# EAGLE board DBSchematics (EAGLE 8.2.1)
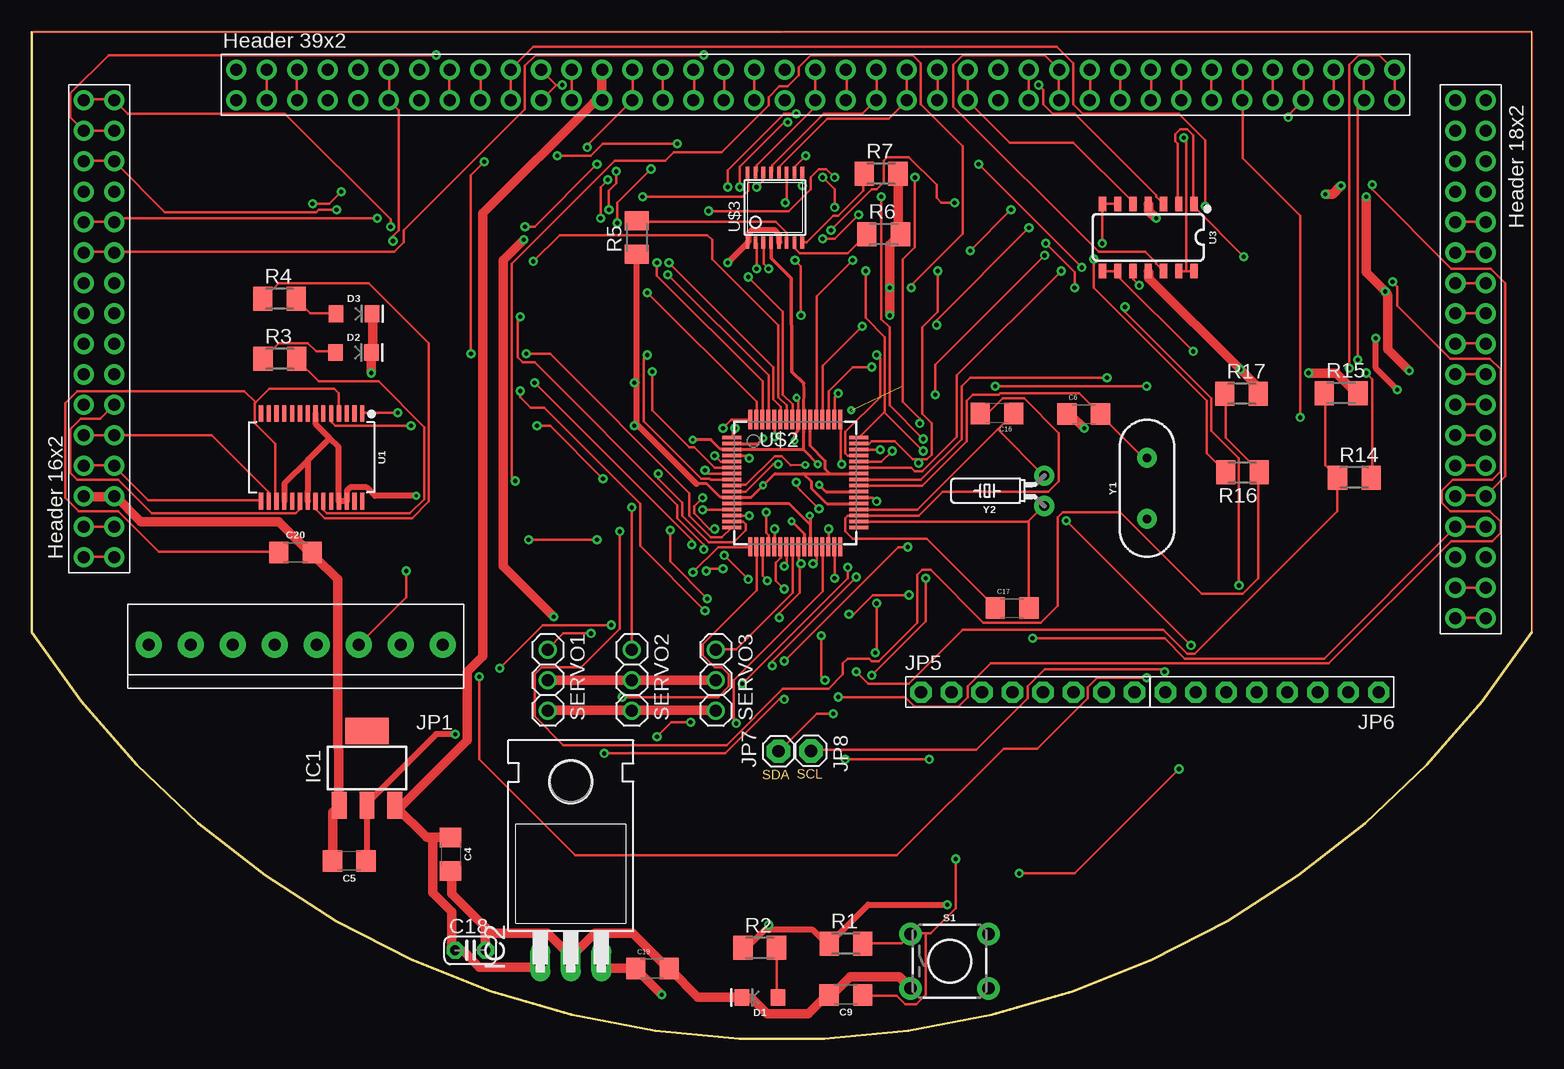
[diagram p0: board, top side]
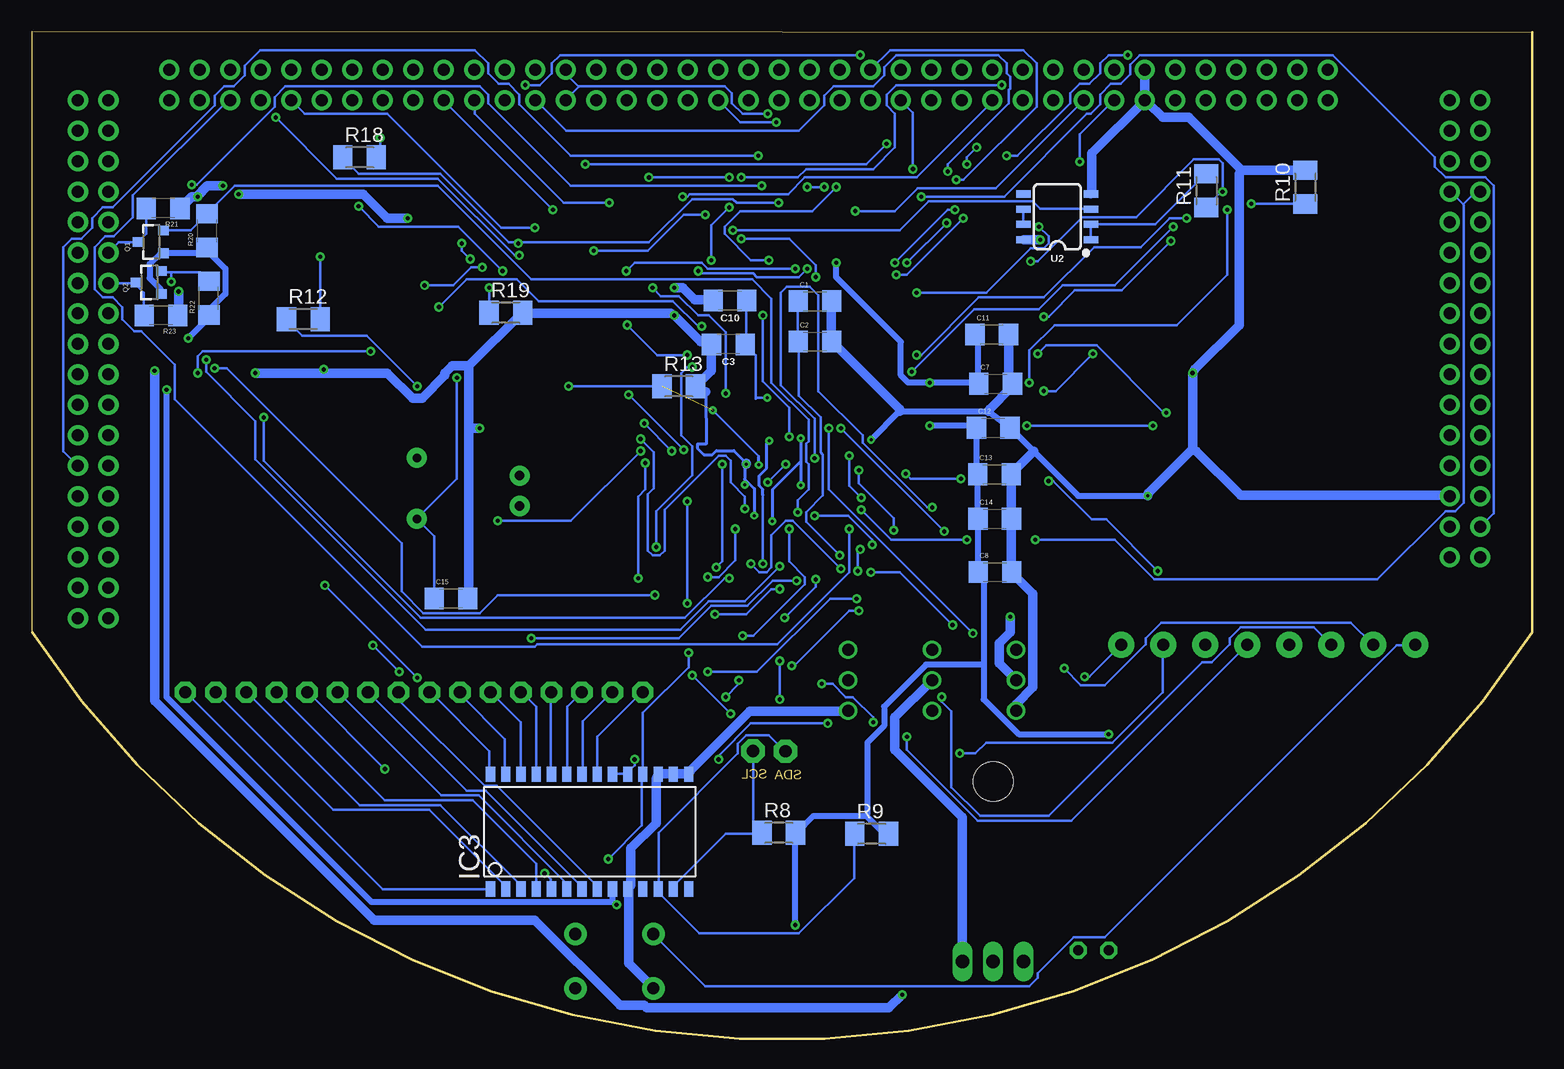
[diagram p1: board, bottom side, seen from below]

Size 125.02 x 83.99 mm. Coordinates in mm from the lower left corner, seen from the top.
Outline: 0,83.9 125.02,83.99 125.02,33.89 arc-114 0.02,33.89 0.02,83.89
Copper layers (1*16): Top 0.035mm / dielectric 1.5mm / Bottom 0.035mm
Design rules "default": minimum track width 6mil, minimum drill 0.35mm, track to track 6mil, track to pad 6mil, pad to pad 6mil, via to via 6mil, smd to smd 6mil, copper to edge 40mil, drill to drill 6mil, minimum pad ring 10mil, minimum via ring 8mil, stop-mask expansion 4mil, vias tented up to drill 0mil, thermal gap 10mil
Net classes: 0 default: width 0.2 mm, clearance 0.2 mm; 1 VSERVO: width 0.8 mm, clearance 0.2 mm; 2 VDD: width 0.5 mm, clearance 0.2 mm

## Footprints (pad centres in the part's own frame; a part is rotated, then mirrored left to right if it is on the bottom)
1206 = smd 1.6 x 1.8: 1 -1.4,0; 2 1.4,0
C025-024X044 = drill 0.813 pad 1.422 octagon: 1 -1.27,0; 2 1.27,0
LED-1206 = smd 1.2 x 1.4: A -1.5,0; C 1.5,0
SOT223 = smd 1.219 x 2.235: 1 -2.311,-3.099; 2 0,-3.099; 3 2.311,-3.099 | smd 3.6 x 2.2: TAB 0,3.099
TO220H = drill 1.118 long: 1 -2.54,-10.16; 2 0,-10.16; 3 2.54,-10.16 | hole 3.302: 0,4.826
SO28W = smd 0.762 x 1.27: 1 -7.62,-4.78; 2 -6.35,-4.78; 3 -5.08,-4.78; 4 -3.81,-4.78; 5 -2.54,-4.78; 6 -1.27,-4.78; 7 0,-4.78; 8 1.27,-4.78; 9 2.54,-4.78; 10 3.81,-4.78; 11 5.08,-4.78; 12 6.35,-4.78; 13 7.62,-4.78; 14 8.89,-4.78; 15 8.89,4.78; 16 7.62,4.78; 17 6.35,4.78; 18 5.08,4.78; 19 3.81,4.78; 20 2.54,4.78; 21 1.27,4.78; 22 0,4.78; 23 -1.27,4.78; 24 -2.54,4.78; 25 -3.81,4.78; 26 -5.08,4.78; 27 -6.35,4.78; 28 -7.62,4.78
1X08-3.5MM = drill 1 pad 2.184: 1 -12.25,0; 2 -8.75,0; 3 -5.25,0; 4 -1.75,0; 5 1.75,0; 6 5.25,0; 7 8.75,0; 8 12.25,0
1X08-BIG = drill 1.016 pad 1.778 octagon: 1 -8.89,0; 2 -6.35,0; 3 -3.81,0; 4 -1.27,0; 5 1.27,0; 6 3.81,0; 7 6.35,0; 8 8.89,0
1X01 = drill 1.016 pad 1.93 octagon: 1 0,0
SOT23-3 = smd 0.8 x 0.9: 1 -0.95,-1; 2 0.95,-1; 3 0,1.1
M1206 = smd 1.6 x 2: 1 -1.4,0; 2 1.4,0
TACTILE_SWITCH_PTH_6.0MM = drill 1.016 pad 1.88: 1 -3.251,2.261; 2 3.251,2.261; 3 -3.251,-2.261; 4 3.251,-2.261
1X03 = drill 1.016: 1 -2.54,0; 2 0,0; 3 2.54,0
SSOP28DB = smd 0.348 x 1.397: 1 -4.225,-3.656; 2 -3.575,-3.656; 3 -2.925,-3.656; 4 -2.275,-3.656; 5 -1.625,-3.656; 6 -0.975,-3.656; 7 -0.325,-3.656; 8 0.325,-3.656; 9 0.975,-3.656; 10 1.625,-3.656; 11 2.275,-3.656; 12 2.925,-3.656; 13 3.575,-3.656; 14 4.225,-3.656; 15 4.225,3.656; 16 3.575,3.656; 17 2.925,3.656; 18 2.275,3.656; 19 1.625,3.656; 20 0.975,3.656; 21 0.325,3.656; 22 -0.325,3.656; 23 -0.975,3.656; 24 -1.625,3.656; 25 -2.275,3.656; 26 -2.925,3.656; 27 -3.575,3.656; 28 -4.225,3.656
SO08 = smd 0.6 x 1.2: 1 -1.905,-2.8; 2 -0.635,-2.8; 3 0.635,-2.8; 4 1.905,-2.8; 5 1.905,2.8; 6 0.635,2.8; 7 -0.635,2.8; 8 -1.905,2.8
SO14 = smd 0.6 x 1.2: 1 -3.175,-2.8; 2 -1.905,-2.8; 3 -0.635,-2.8; 4 0.635,-2.8; 5 1.905,-2.8; 6 3.175,-2.8; 7 4.445,-2.8; 8 4.445,2.8; 9 3.175,2.8; 10 1.905,2.8; 11 0.635,2.8; 12 -0.635,2.8; 13 -1.905,2.8; 14 -3.175,2.8
DAUGHTERBOARD = drill 1 pad 1.676: 1 -22.86,-22.86; 1' -25.4,-22.86; 2 -22.86,-20.32; 2' -25.4,-20.32; 3 -22.86,-17.78; 3' -25.4,-17.78; 4 -22.86,-15.24; 4' -25.4,-15.24; 5 -22.86,-12.7; 5' -25.4,-12.7; 6 -22.86,-10.16; 6' -25.4,-10.16; 7 -22.86,-7.62; 7A -25.4,-7.62; 8 -22.86,-5.08; 8A -25.4,-5.08; 9 -22.86,-2.54; 9A -25.4,-2.54; 10 -22.86,0; 10A -25.4,0; 11 -22.86,2.54; 11' -25.4,2.54; 12 -22.86,5.08; 12' -25.4,5.08; 13 -22.86,7.62; 13' -25.4,7.62; 14 -22.86,10.16; 14' -25.4,10.16; 15 -22.86,12.7; 15' -25.4,12.7; 16 -22.86,15.24; 16' -25.4,15.24; 17A -12.7,17.78; 17B -12.7,15.24; 18 -10.16,15.24; 18' -10.16,17.78; 19 -7.62,15.24; 19' -7.62,17.78; 20 -5.08,15.24; 20A -5.08,17.78; 21 -2.54,15.24; 21A -2.54,17.78; 22 0,15.24; 22' 0,17.78; 23 2.54,15.24; 23' 2.54,17.78; 24 5.08,15.24; 24' 5.08,17.78; 25 7.62,15.24; 25' 7.62,17.78; 26 10.16,15.24; 26' 10.16,17.78; 27 12.7,15.24; 27' 12.7,17.78; 28 15.24,15.24; 28' 15.24,17.78; 29 17.78,15.24; 29' 17.78,17.78; 30 20.32,15.24; 30' 20.32,17.78; 31 22.86,15.24; 31' 22.86,17.78; 32 25.4,15.24; 32' 25.4,17.78; 33 27.94,15.24; 33' 27.94,17.78; 34 30.48,15.24; 34' 30.48,17.78; 35 33.02,15.24; 35A 33.02,17.78; 36 35.56,15.24; 36' 35.56,17.78; 37 38.1,15.24; 37' 38.1,17.78; 38 40.64,15.24; 38' 40.64,17.78; 39 43.18,15.24; 39' 43.18,17.78; 40 45.72,15.24; 40' 45.72,17.78; 41 48.26,15.24; 41' 48.26,17.78; 42 50.8,15.24; 42' 50.8,17.78; 43 53.34,15.24; 43' 53.34,17.78; 44 55.88,15.24; 44' 55.88,17.78; 45 58.42,15.24; 45' 58.42,17.78; 46 60.96,15.24; 46' 60.96,17.78; 47 63.5,15.24; 47' 63.5,17.78; 48 66.04,15.24; 48' 66.04,17.78; 49 68.58,15.24; 49' 68.58,17.78; 50 71.12,15.24; 50' 71.12,17.78; 51 73.66,15.24; 51' 73.66,17.78; 52 76.2,15.24; 52' 76.2,17.78; 53 78.74,15.24; 53' 78.74,17.78; 54 81.28,15.24; 54' 81.28,17.78; 55 83.82,15.24; 55' 83.82,17.78; 57 88.9,15.24; 57A 91.44,15.24; 58 88.9,12.7; 58A 91.44,12.7; 59 88.9,10.16; 59A 91.44,10.16; 60 88.9,7.62; 60A 91.44,7.62; 61 88.9,5.08; 61' 91.44,5.08; 62 88.9,2.54; 62' 91.44,2.54; 63 88.9,0; 63' 91.44,0; 64 88.9,-2.54; 64' 91.44,-2.54; 65 88.9,-5.08; 65' 91.44,-5.08; 66 88.9,-7.62; 66' 91.44,-7.62; 67 88.9,-10.16; 67' 91.44,-10.16; 68 88.9,-12.7; 68' 91.44,-12.7; 69 88.9,-15.24; 69' 91.44,-15.24; 70 88.9,-17.78; 70' 91.44,-17.78; 71 88.9,-20.32; 71' 91.44,-20.32; 72 88.9,-22.86; 72' 91.44,-22.86; 73 88.9,-25.4; 73' 91.44,-25.4; 74 88.9,-27.94; 74' 91.44,-27.94
LQFP = smd 1.6 x 0.3: 1 -5.3,3.8; 2 -5.3,3.3; 3 -5.3,2.8; 4 -5.3,2.3; 5 -5.3,1.8; 6 -5.3,1.3; 7 -5.3,0.8; 8 -5.3,0.3; 9 -5.3,-0.2; 10 -5.3,-0.7; 11 -5.3,-1.2; 12 -5.3,-1.7; 13 -5.3,-2.2; 14 -5.3,-2.7; 15 -5.3,-3.2; 16 -5.3,-3.7; 33 5.3,-3.7; 34 5.3,-3.2; 35 5.3,-2.7; 36 5.3,-2.2; 37 5.3,-1.7; 38 5.3,-1.2; 39 5.3,-0.7; 40 5.3,-0.2; 41 5.3,0.3; 42 5.3,0.8; 43 5.3,1.3; 44 5.3,1.8; 45 5.3,2.3; 46 5.3,2.8; 47 5.3,3.3; 48 5.3,3.8 | smd 0.3 x 1.6: 17 -3.75,-5.3; 18 -3.25,-5.3; 19 -2.75,-5.3; 20 -2.25,-5.3; 21 -1.75,-5.3; 22 -1.25,-5.3; 23 -0.75,-5.3; 24 -0.25,-5.3; 25 0.25,-5.3; 26 0.75,-5.3; 27 1.25,-5.3; 28 1.75,-5.3; 29 2.25,-5.3; 30 2.75,-5.3; 31 3.25,-5.3; 32 3.75,-5.3; 49 3.75,5.3; 50 3.25,5.3; 51 2.75,5.3; 52 2.25,5.3; 53 1.75,5.3; 54 1.25,5.3; 55 0.75,5.3; 56 0.25,5.3; 57 -0.25,5.3; 58 -0.75,5.3; 59 -1.25,5.3; 60 -1.75,5.3; 61 -2.25,5.3; 62 -2.75,5.3; 63 -3.25,5.3; 64 -3.75,5.3
ADC12_SD = smd 0.305 x 0.991: 1 -2.275,-2.918; 2 -1.625,-2.918; 3 -0.975,-2.918; 4 -0.325,-2.918; 5 0.325,-2.918; 6 0.975,-2.918; 7 1.625,-2.918; 8 2.275,-2.918; 9 2.275,2.918; 10 1.625,2.918; 11 0.975,2.918; 12 0.325,2.918; 13 -0.325,2.918; 14 -0.975,2.918; 15 -1.625,2.918; 16 -2.275,2.918
HC49US = drill 0.7 pad 1.651: 1 -2.54,0; 2 2.54,0
CRYSTAL-PTH-2X6-CYL = drill 0.813 pad 1.676: 1 -1.27,0; 2 1.27,0

## Placement (x,y rotation side)
C1  0.01uF  [1206]  59.79,61.48 0 bottom
C2  0.01uF  [1206]  59.78,58.12 0 bottom
C3  2.2uF  [1206]  67,57.88 180 bottom
C4  10uF  [1206]  34.93,15.39 270 top
C5  10uF  [1206]  26.48,14.82 180 top
C6  24pF  [1206]  87.69,52.08 0 top
C7  2.2uF  [1206]  44.73,54.6 0 bottom
C8  0.01uF  [1206]  44.79,38.91 0 bottom
C9  2.2uF  [1206]  67.86,3.67 180 top
C10  1.0uF  [1206]  66.87,61.52 180 bottom
C11  0.01uF  [1206]  45.05,58.71 0 bottom
C12  0.01uF  [1206]  44.92,50.93 0 bottom
C13  0.01uF  [1206]  44.82,47.05 0 bottom
C14  0.01uF  [1206]  44.8,43.35 0 bottom
C15  24pF  [1206]  90.11,36.71 0 bottom
C16  10pf  [1206]  80.45,52.13 180 top
C17  10pF  [1206]  81.72,35.91 0 top
C18  100uF  [C025-024X044]  36.57,7.38 0 top
C19  0.1uF  [1206]  51.74,5.88 0 top
C20  0.1uF  [1206]  21.99,40.54 0 top
D1  WHITE  [LED-1206]  60.71,3.45 180 top
D2  GREEN  [LED-1206]  26.84,57.19 0 top
D3  RED  [LED-1206]  26.87,60.43 0 top
IC1  LM1117-3.3  [SOT223]  27.95,22.57 0 top
IC2  7805T  [TO220H]  44.94,16.62 0 top
IC3  MCP23017SO  [SO28W]  79.2,17.27 0 bottom
JP1  [1X08-3.5MM]  22.02,32.84 0 top
JP5  [1X08-BIG]  83.02,28.89 0 top
JP6  [1X08-BIG]  103.37,28.89 180 top
JP7  [1X01]  62.24,23.98 90 top
JP8  [1X01]  64.95,24 270 top
Q1  BSS138  [SOT23-3]  115.08,66.43 90 bottom
Q2  BSS138  [SOT23-3]  115.23,63.04 90 bottom
R1  10K  [M1206]  67.87,7.93 0 top
R2  330  [M1206]  60.68,7.58 0 top
R3  330  [M1206]  20.69,56.67 0 top
R4  330  [M1206]  20.67,61.67 0 top
R5  4.7K  [M1206]  50.45,66.79 90 top
R6  1K  [M1206]  71.01,67.06 0 top
R7  1K  [M1206]  70.8,72.09 0 top
R8  10K  [M1206]  62.8,17.17 0 bottom
R9  10k  [M1206]  55.07,17.09 0 bottom
R10  33K  [M1206]  18.92,70.98 90 bottom
R11  22K  [M1206]  27.16,70.69 90 bottom
R12  22K  [M1206]  102.42,59.98 0 bottom
R13  33K  [M1206]  71.14,54.37 0 bottom
R14  22k  [M1206]  110.23,46.78 0 top
R15  33k  [M1206]  109.13,53.82 0 top
R16  22K  [M1206]  100.91,47.21 180 top
R17  33k  [M1206]  100.84,53.75 0 top
R18  22K  [M1206]  97.73,73.46 0 bottom
R19  33K  [M1206]  85.55,60.51 0 bottom
R20  10K  [1206]  110.44,67.36 90 bottom
R21  10K  [1206]  114.1,69.22 180 bottom
R22  10K  [1206]  110.29,61.73 90 bottom
R23  10K  [1206]  114.28,60.28 180 bottom
S1  Push Button  [TACTILE_SWITCH_PTH_6.0MM]  76.5,6.48 0 top
SERVO1  [1X03]  43.02,29.89 270 top
SERVO2  [1X03]  50.02,29.89 270 top
SERVO3  [1X03]  57.02,29.89 270 top
U1  FT232RL  [SSOP28DB]  23.34,48.47 180 top
U2  LMV358  [SO08]  39.59,68.51 90 bottom
U3  LMV324  [SO14]  93.7,66.78 180 top
U$1  DAUGHTERBOARDDAUGHTERBOARD  [DAUGHTERBOARD]  29.76,62.99 0 top
U$2  TM4C123GH6PMS-PQFP-G64  [LQFP]  63.65,46.32 0 top
U$3  ADC128D818  [ADC12_SD]  61.95,69.28 0 top
Y1  16MHz  [HC49US]  92.96,45.88 90 top
Y2  32.768kHz  [CRYSTAL-PTH-2X6-CYL]  84.4,45.68 90 top

## Library data of the parts
C1 C2 C6-C8 C11-C17 C19 = SparkFun-Retired; PROD_ID: CAP-10009
C3 C9 = SparkFun-Capacitors; PROD_ID: CAP-10009
C4 C5 C20 = SparkFun-Capacitors; PROD_ID: CAP-10057
C10 = SparkFun-Capacitors; PROD_ID: CAP-09822
C18 IC2 IC3 JP1 JP5-JP8 R1-R19 SERVO1-SERVO3 = adafruit
D1-D3 = SparkFun-LED; PROD_ID: DIO-09955
IC1 = lm1117
Q1 Q2 R20-R23 = SparkFun
S1 = SparkFun-Switches; PROD_ID: SWCH-08441; SF_SKU: COM-00097
U1 = SparkFun-IC-Comms; PROD_ID: IC-00870
U2 = SparkFun-IC-Amplifiers; PROD_ID: IC-09657
U3 = SparkFun-IC-Amplifiers; PROD_ID: IC-08227
U$1 = Daughterboard
U$2 = TM4C123GH6PM
U$3 = ADC128D818
Y1 = SparkFun-Clocks; PROD_ID: XTAL-08181; SF_ID: COM-00536
Y2 = SparkFun-Clocks; PROD_ID: XTAL-10112

## Nets
BUZZER: U$1.71 U$1.71' U$2.19
DB4: U$1.26 U$1.26' U$2.43
DB5: U$1.25 U$1.25' U$2.44
DB6: U$1.27 U$1.27' U$2.53
DB7: U$1.28 U$1.28' U$2.10
EN: U$1.24 U$1.24' U$2.30
EXTSHARP: R18.1 R19.1 U$3.11
FDSFSDF: R12.2 U3.1 U3.2
GND [VSERVO]: C1.2 C2.2 C3.2 C4.2 C5.2 C6.1 C7.2 C8.2 C9.2 C10.2 C11.2 C12.2 C13.2 C14.2 C15.2 C18.2 C19.2 C20.2 D1.C D2.C D3.C IC1.1 IC2.2 IC3.10 IC3.15 IC3.16 IC3.17 R6.2 R7.2 R10.2 R13.2 R15.2 R17.2 R19.2 S1.3 SERVO1.3 SERVO2.3 SERVO3.3 U1.7 U1.18 U1.21 U1.25 U1.26 U2.4 U3.11 U$1.3 U$1.3' U$1.23 U$1.23' U$2.3 U$2.12 U$2.27 U$2.39 U$2.55 U$3.4
GNDX: C16.2 C17.1 U$2.35
HGHJ: R11.2 U2.1 U2.2
INTAB: IC3.19 IC3.20 U$2.29
IR8: U$1.2 U$1.2' U$3.16
LPE: Q1.3 R21.2 U$1.62 U$1.62'
N$1: U$1.1 U$1.1'
N$2: IC3.21 JP5.1
N$3: C6.2 U$2.40 Y1.2
N$5: IC3.22 JP5.2
N$6: U2.6 U2.7
N$7: U$1.70 U$1.70' U$3.9
N$8: IC3.23 JP5.3
N$9: IC3.24 JP5.4
N$10: IC3.25 JP5.5
N$11: JP1.8 U$2.52
N$12: U$1.74 U$1.74'
N$13: U$1.73 U$1.73'
N$14: R18.2 U3.13 U3.14
N$15: JP1.7 U$2.51
N$16: U$1.69 U$1.69' U$3.10
N$17: U$1.68 U$1.68'
N$18: U$1.67 U$1.67'
N$19: U$1.66 U$1.66'
N$20: U$1.65 U$1.65'
N$21: U$1.64 U$1.64'
N$22: R6.1 U$3.7
N$23: IC3.26 JP5.6
N$24: U$1.61 U$1.61'
N$25: JP1.6 U$2.50
N$26: D1.A R2.2
N$27: C17.2 U$2.34 Y2.1
N$28: C16.1 U$2.36 Y2.2
N$29: U$1.18 U$1.18'
N$30: U$1.19 U$1.19'
N$31: JP1.5 U$2.49
N$32: IC3.27 JP5.7
N$33: IC3.28 JP5.8
N$34: IC3.1 JP6.1
N$35: IC3.2 JP6.2
N$36: IC3.3 JP6.3
N$37: IC3.4 JP6.4
N$38: IC3.5 JP6.5
N$39: IC3.6 JP6.6
N$40: IC3.7 JP6.7
N$41: IC3.8 JP6.8
N$42: U$1.33 U$1.33'
N$43: U$1.34 U$1.34'
N$48: U$1.40 U$1.40'
N$55: U$1.47 U$1.47'
N$56: U$1.48 U$1.48'
N$57: U$1.49 U$1.49'
N$67: R4.1 U1.22
N$68: R3.2 U1.23
N$69: D3.A R4.2
N$70: D2.A R3.1
N$71: R5.2 U$3.6
N$73: R7.1 U$3.8
N$77: C20.1 U1.4 U1.17
NO: C15.1 U$2.41 Y1.1
PA3: Q1.2 R20.2 U$2.20
PA4: Q2.2 R22.2 U$2.21
PA5: U$1.55 U$1.55' U$2.22
PA6: U$1.54 U$1.54' U$2.23
PB0: U$1.51 U$1.51' U$2.45
PB1: U$1.52 U$1.52' U$2.46
PB4: R10.1 R11.1 U$2.58
PB5: U$1.46 U$1.46' U$2.57
PD3: R16.1 R17.1 U$2.64
PE0: R12.1 R13.1 U$2.9
PE1: U$1.12 U$1.12' U$2.8
PE2: R14.1 R15.1 U$2.7
PE3: U$1.16 U$1.16' U$2.6
PE4: U$1.43 U$1.43' U$2.59
PE5: U$1.42 U$1.42' U$2.60
PF3: U$1.50 U$1.50' U$2.31
PF4: U$1.53 U$1.53' U$2.5
RPE: Q2.3 R23.2 U$1.63 U$1.63'
RS: U$1.22 U$1.22' U$2.28
RST: C9.1 IC3.18 JP1.1 R1.2 S1.1 U$2.38
RX: JP1.2 U$2.17
RXD: U1.1 U$2.16
SCL: IC3.12 JP7.1 R9.1 U$2.47 U$3.3
SDA: IC3.13 JP8.1 R8.1 U$2.48 U$3.2
SDFSDFSD: R14.2 U3.8 U3.9
SERVO1: SERVO1.1 U$2.1
SERVO2: SERVO2.1 U$2.4
SERVO3: SERVO3.1 U$2.24
SHARP1: U3.3 U$1.11 U$1.11'
SHARP2: U3.10 U$1.15 U$1.15'
SHARP3: U3.5 U$1.41 U$1.41'
SHARP4: U3.12 U$1.44 U$1.44'
SHARP5: U2.3 U$1.45 U$1.45'
TX: JP1.3 U$2.18
TXD: U1.5 U$2.15
USB+: U1.15 U$1.4 U$1.4'
USB-: U1.16 U$1.5 U$1.5'
VBATTERY [VSERVO]: C4.1 C18.1 IC1.3 IC2.1 U$1.29 U$1.29'
VDD [VDD]: C5.1 C7.1 C8.1 C11.1 C12.1 C13.1 C14.1 IC1.2 IC3.9 Q1.1 Q2.1 R1.1 R2.1 R5.1 R8.2 R9.2 R20.1 R22.1 U$2.2 U$2.11 U$2.26 U$2.37 U$2.42 U$2.54 U$3.1 U$3.5
VDDC: C1.1 C2.1 C3.1 C10.1 U$2.25 U$2.56
VSERVO [VSERVO]: C19.1 IC2.3 R21.1 R23.1 SERVO1.2 SERVO2.2 SERVO3.2 U2.8 U3.4
VUSB: U1.20 U$1.6
WL1: U$1.30 U$1.30' U$2.63
WL2: U$1.31 U$1.31' U$2.62
WL3: U$1.32 U$1.32' U$2.61
WL4: U$1.36 U$1.36' U$3.15
WL5: U$1.37 U$1.37' U$3.14
WL6: U$1.38 U$1.38' U$3.13
WL7: U$1.39 U$1.39' U$3.12
XXVX: R16.2 U3.6 U3.7
ZIGBEERX: U$1.13 U$1.13' U$2.13
ZIGBEETX: U$1.14 U$1.14' U$2.14

## Tracks (layer width: path | path; a pad name or v marks a point on that pad's centre or on a via)
BUZZER  (via drill 0.35)
  Top 0.2: v61.32,38.19 60.92,38.59 60.92,40.99 U$2.19 | v83.42,33.39 94.42,33.39 96.12,31.69 107.72,31.69 118.62,42.59 U$1.71 118.72,42.69 121.12,42.69 U$1.71'
  Bottom 0.2: v61.32,38.19 63.32,38.19 65.42,36.09 68.42,36.09 71.12,33.39 v83.42,33.39
DB4  (via drill 0.35)
  Top 0.2: v85.82,63.99 77.12,55.29 77.12,50.19 74.22,47.29 73.62,47.29 73.32,47.59 69.02,47.59 U$2.43 | v97.82,69.39 97.82,74.89 95.62,77.09 87.62,77.09 86.82,77.89 86.82,81.29 85.42,82.69 41.82,82.69 39.92,80.79 U$1.26' U$1.26
  Bottom 0.2: v85.82,63.99 89.52,67.69 96.12,67.69 v97.82,69.39
DB5  (via drill 0.35)
  Top 0.2: v71.72,48.99 70.82,48.09 69.02,48.09 U$2.44 | v74.02,51.29 74.02,51.69 72.62,53.09 72.62,64.99 73.62,65.99 v73.62,71.79 | v66.92,71.79 66.22,72.49 65.62,72.49 64.92,71.79 64.92,70.79 63.12,68.99 v56.42,68.99 | U$1.25' 37.42,80.69 37.42,78.29 U$1.25
  Bottom 0.2: v74.02,51.29 v71.72,48.99 | v66.92,71.79 v73.62,71.79 | v56.42,68.99 53.12,68.99 51.22,70.89 44.72,70.89 U$1.25
DB6  (via drill 0.35)
  Top 0.2: v68.42,64.89 65.42,61.89 65.42,51.69 U$2.53 | v66.92,69.29 66.92,70.79 v65.92,71.79 | 43.72,79.49 v44.22,79.49 | 43.72,79.49 42.52,80.69 U$1.27' | 43.72,79.49 U$1.27
  Bottom 0.2: v68.42,64.89 68.42,67.79 v66.92,69.29 | v65.92,71.79 61.22,71.79 60.52,72.49 54.92,72.49 53.12,74.29 53.12,77.09 53.82,77.79 53.82,78.69 53.02,79.49 v44.22,79.49
DB7  (via drill 0.35)
  Top 0.2: v62.22,47.89 61.82,47.89 59.52,45.59 58.42,45.59 U$2.10 | v63.72,46.39 63.72,46.09 64.07,45.74 v65.62,44.19 | v74.32,49.99 71.52,52.79 71.52,59.29 70.82,59.99 v70.82,70.19 | U$1.28' 45.02,80.69 45.02,78.29 U$1.28
  Bottom 0.2: v63.72,46.39 v62.22,47.89 | v65.62,44.19 65.62,45.19 66.82,46.39 66.82,48.19 67.22,48.59 67.82,48.59 72.32,44.09 72.32,40.69 72.72,40.29 73.32,40.29 73.72,40.69 73.72,45.39 73.22,45.89 73.22,48.89 v74.32,49.99 | v70.82,70.19 70.42,70.19 70.22,70.39 62.02,70.39 60.62,71.79 51.32,71.79 44.92,78.19 U$1.28
EN  (via drill 0.35)
  Top 0.2: v66.42,42.49 66.42,41.09 U$2.30 | v68.72,38.49 61.72,31.49 v61.72,31.09 | v56.12,35.69 50.72,41.09 50.72,44.59 42.72,52.59 41.62,52.59 40.72,53.49 v40.72,53.99 | v36.62,57.09 36.62,71.99 v37.72,73.09 | U$1.24' 34.82,80.69 34.82,78.29 U$1.24
  Bottom 0.2: v66.42,42.49 66.42,39.89 67.82,38.49 v68.72,38.49 | v61.72,31.09 61.52,31.09 56.92,35.69 v56.12,35.69 | v40.72,53.99 39.72,53.99 v36.62,57.09 | v37.72,73.09 37.72,75.39 34.92,78.19 U$1.24
EXTSHARP  (via drill 0.35)
  Top 0.2: v62.82,69.69 62.92,69.79 U$3.11 | v86.92,62.59 86.92,63.89 v84.52,66.29
  Bottom 0.2: v62.82,69.69 66.32,69.69 66.62,69.99 70.02,69.99 73.62,66.39 84.52,66.39 | 84.52,66.39 85.32,66.39 91.02,72.09 97.82,72.09 99.12,73.39 R18.1 | v86.92,62.59 86.92,60.59 R19.1 | 84.52,66.39 v84.52,66.29
FDSFSDF  (via drill 0.35)
  Top 0.2: U3.2 95.52,69.59 95.52,74.59 95.32,74.79 95.32,75.39 95.72,75.79 96.32,75.79 96.82,75.29 96.82,69.59 U3.1 96.92,69.49 96.92,69.29 v101.02,65.19
  Bottom 0.2: v101.02,65.19 R12.2
GND  (via drill 0.25, 0.35)
  Top 0.254: 64.35,49.12 U$2.3 58.32,49.14 57.41,49.14 56.62,49.93 v55.11,49.93 | 64.35,49.12 64.35,50.6 64.37,51.59 U$2.55 64.37,51.64 64.37,52.55 64.38,54.13 64.37,54.63 | 64.35,49.12 v65.51,47.87 | v65.64,46.18 66.2,45.62 U$2.39 | v64.84,43.62 64.89,43.56 64.89,42.86 | 64.89,42.86 U$2.27 | 64.89,42.86 63.14,44.62 U$2.12 58.37,44.64
  Top 0.305: 64.37,54.63 63.35,55.62 63.3,63.38 61.63,65.06 U$3.4
  Top 0.508: v32.07,45.26 28.63,45.26 27.93,45.96 26.55,45.96 26.29,45.7 26.29,44.83 U1.26 U1.25 25.59,44.83 25.59,49.33 24.85,50.08 | 24.85,50.08 23.69,51.23 23.69,51.57 23.67,51.59 U1.7 | 23.05,48.28 24.85,50.08 | 23.05,48.28 21.07,46.29 U1.18 | U1.21 23.04,44.83 23.04,45.7 23.05,45.71 23.05,48.28
  Top 0.8: 37.82,8.79 37.82,7.39 C18.2 | 37.82,8.79 37.82,9.29 35.02,12.09 35.02,13.89 C4.2 | 37.82,8.79 43.02,8.79 44.92,6.89 44.92,6.49 IC2.2 45.22,7.09 46.92,8.79 50.12,8.79 52.82,6.09 C19.2 53.22,5.79 55.52,3.49 59.12,3.49 D1.C 59.62,3.39 60.02,3.39 61.32,2.09 64.72,2.09 66.12,3.49 C9.2 66.52,3.69 66.72,3.69 68.22,5.19 72.32,5.19 73.22,4.29 S1.3 | C5.2 25.12,14.89 25.12,18.89 25.62,19.39 IC1.1 25.62,19.89 25.62,24.19 25.52,24.29 25.52,38.29 23.62,40.19 C20.2 23.32,40.59 23.12,40.59 20.62,43.09 9.12,43.09 6.92,45.29 U$1.3 6.52,45.19 4.42,45.19 U$1.3' | U3.11 93.12,63.89 93.12,63.39 v100.72,55.79 102.22,54.29 102.22,53.79 R17.2 | v87.72,50.89 86.62,51.99 86.32,51.99 C6.1 | v106.42,55.49 108.72,55.49 110.32,53.89 110.52,53.89 R15.2 | SERVO1.3 43.02,27.39 50.02,27.39 SERVO2.3 50.32,27.39 57.02,27.39 SERVO3.3 | R7.2 72.22,72.09 72.22,67.39 R6.2 72.32,66.99 71.52,66.19 v71.52,62.59 v71.52,60.29 | D3.C 28.42,60.39 28.42,57.29 D2.C 28.32,56.79 v28.32,55.49
  Bottom 0.254: v65.51,47.87 65.64,47.74 65.64,46.65 | 65.64,46.65 v65.64,46.18 | 65.64,46.65 64.84,45.85 v64.84,43.62 | 68.87,53.94 68.86,49.56 69.59,49.57 69.59,49.24 69.04,48.69 68.33,48.69 68,49.02 66.55,49.02 65.52,47.99
  Bottom 0.508: v55.11,49.93 52.76,52.29 52.72,52.29 45.34,52.29 C12.2 41.55,48.96 37.85,45.26 v32.07,45.26
  Bottom 0.8: S1.3 73.32,4.29 75.32,6.29 75.32,12.49 IC3.10 75.12,12.79 75.12,15.89 73.02,17.99 73.02,21.69 IC3.17 72.82,22.09 71.92,22.09 IC3.16 71.52,22.09 70.32,22.09 IC3.15 70.12,22.39 65.22,27.29 57.02,27.29 SERVO3.3 | 88.62,56.09 88.62,50.89 | 88.62,50.89 88.62,36.79 C15.2 | 88.62,56.09 84.22,60.49 R19.2 83.82,60.49 71.82,60.49 v71.52,60.29 69.32,58.09 68.72,58.09 C3.2 68.42,57.79 68.42,55.69 69.72,54.39 R13.2 69.62,53.99 68.87,53.94 | 88.62,50.89 v87.72,50.89 | 100.72,55.49 95.42,55.49 93.32,53.39 92.52,53.39 90.62,55.29 90.62,55.49 90.02,56.09 88.62,56.09 | 100.72,55.49 v106.42,55.49 | v100.72,55.79 100.72,55.49 | U2.4 36.72,70.49 36.72,73.79 32.32,78.19 U$1.23 | 24.22,72.39 19.02,72.39 R10.2 | 24.22,72.39 28.62,76.79 30.82,76.79 32.02,77.99 U$1.23 | U$1.23' 32.32,80.69 32.32,78.59 U$1.23 | v71.52,62.59 70.82,62.59 69.82,61.59 68.32,61.59 C10.2 | C1.2 58.42,61.39 58.42,58.19 C2.2 58.12,57.89 52.72,52.49 52.72,52.29 | 45.34,52.29 45.22,52.49 43.42,54.29 43.42,54.59 C7.2 43.62,54.89 43.62,58.69 C11.2 | 41.55,48.96 43.42,47.09 C13.2 43.42,43.69 C14.2 43.42,43.29 43.42,38.99 C8.2 43.12,38.59 41.62,37.09 41.62,29.29 43.02,27.89 SERVO1.3 | 28.32,49.19 v28.32,55.49 28.12,55.79 24.42,59.49 24.42,72.09 24.22,72.39 | 28.32,49.19 32.02,45.49 v32.07,45.26 | 65.52,47.99 v65.51,47.87 | U$1.3 6.92,45.29 24.32,45.29 28.02,48.99 28.32,49.19
GNDX
  Top 0.2: C17.1 80.32,35.99 74.62,41.69 68.42,41.69 67.82,42.29 67.82,43.39 68.02,43.59 68.92,43.59 U$2.35 69.02,43.59 73.92,43.59 75.92,45.59 84.72,45.59 85.62,46.49 85.62,50.49 82.72,53.39 80.92,53.39 79.72,52.19 79.12,52.19 C16.2
HGHJ
  Bottom 0.2: U2.1 36.82,66.69 36.82,67.79 U2.2 36.72,67.89 31.42,67.89 27.22,72.09 R11.2
INTAB  (via drill 0.35)
  Top 0.2: v58.72,26.29 58.52,26.49 58.52,29.89 65.92,37.29 65.92,40.99 U$2.29 | v74.82,23.29 v67.82,23.29
  Bottom 0.2: IC3.20 76.62,22.09 75.42,22.09 IC3.19 75.42,22.19 74.82,22.79 v74.82,23.29 | v58.72,26.29 65.12,26.29 67.82,23.59 v67.82,23.29
IR8  (via drill 0.35)
  Top 0.2: v50.92,70.19 59.22,70.19 59.72,70.69 59.72,72.19 U$3.16 | U$1.2 6.82,42.69 4.42,42.69 U$1.2'
  Bottom 0.2: v50.92,70.19 44.02,70.19 37.12,77.09 36.82,77.09 36.02,77.89 36.02,78.69 35.12,79.59 34.32,79.59 33.52,80.39 33.52,81.19 32.72,81.99 16.62,81.99 8.12,73.49 8.12,72.69 7.22,71.79 3.92,71.79 3.22,71.09 3.22,43.79 4.32,42.69 U$1.2'
LPE
  Top 0.2: U$1.62' 121.12,65.59 118.72,65.59 U$1.62
  Bottom 0.2: U$1.62 118.62,65.59 117.82,66.39 116.22,66.39 Q1.3 116.12,66.49 115.52,67.09 115.52,69.19 R21.2
N$1
  Top 0.2: U$1.1' 4.42,40.19 6.82,40.19 U$1.1
N$2
  Bottom 0.2: IC3.21 77.92,22.09 77.92,25.19 74.22,28.89 JP5.1
N$3
  Top 0.2: U$2.40 69.02,46.09 74.22,46.09 77.92,49.79 77.92,53.19 78.42,53.69 80.62,53.69 80.72,53.79 87.32,53.79 89.02,52.09 C6.2 89.12,51.99 92.62,48.49 92.92,48.49 Y1.2
N$4
  Top 0.152: 0.03,83.92 124.99,83.92 125,83.92 125,33.94 125.05,33.9
N$5
  Bottom 0.2: IC3.22 79.12,22.09 79.12,26.49 76.72,28.89 JP5.2
N$6
  Bottom 0.2: U2.7 42.42,67.89 42.42,69.09 U2.6
N$7  (via drill 0.35)
  Top 0.2: v64.22,71.09 U$3.9 | v111.72,71.19 111.72,70.79 118.32,64.19 121.62,64.19 122.82,62.99 122.82,46.89 121.22,45.29 U$1.70' 121.12,45.29 118.72,45.29 U$1.70
  Bottom 0.2: v64.22,71.09 80.12,71.09 87.02,77.99 87.02,78.69 87.72,79.39 103.92,79.39 104.82,78.49 104.82,77.69 111.32,71.19 v111.72,71.19
N$8
  Bottom 0.2: IC3.23 80.42,22.09 80.42,27.69 JP5.3
N$9
  Bottom 0.2: IC3.24 81.82,22.09 81.82,28.89 JP5.4
N$10
  Bottom 0.2: IC3.25 83.02,22.09 83.02,27.69 84.22,28.89 JP5.5
N$11  (via drill 0.35)
  Top 0.2: v69.22,59.39 65.92,56.09 65.92,51.69 U$2.52 | v91.12,60.99 91.12,60.59 98.32,53.39 98.32,50.69 100.62,48.39 v100.62,37.79 | v92.92,30.09 88.82,30.09 88.02,29.29 88.02,28.39 83.82,24.19 81.02,24.19 72.12,15.29 45.32,15.29 37.32,23.29 v37.32,30.19
  Bottom 0.2: v69.22,59.39 69.52,59.39 71.62,61.49 82.82,61.49 84.62,63.29 88.82,63.29 v91.12,60.99 | v92.92,30.09 v100.62,37.79 | v37.32,30.19 36.92,30.19 34.32,32.79 JP1.8
N$12
  Top 0.2: U$1.74 118.72,35.09 121.12,35.09 U$1.74'
N$13
  Top 0.2: U$1.73' U$1.73
N$14  (via drill 0.35)
  Top 0.2: 96.22,63.99 96.82,63.99 U3.14 | 96.22,63.99 U3.13 | 96.22,63.99 96.22,74.89 v96.02,75.09
  Bottom 0.2: v96.02,75.09 96.02,73.79 96.32,73.49 R18.2
N$15  (via drill 0.35)
  Top 0.2: v70.02,55.99 68.42,55.99 66.42,53.99 66.42,51.69 U$2.51 | v73.02,40.99 72.22,40.99 v62.72,31.49 | v62.72,28.29 62.32,28.29 57.82,23.79 v47.72,23.79
  Bottom 0.2: v70.02,55.99 70.42,55.99 70.92,55.49 70.92,50.29 70.02,49.39 70.02,46.99 73.02,43.99 v73.02,40.99 | v62.72,28.29 v62.72,31.49 | v47.72,23.79 46.42,23.79 45.52,24.69 35.02,24.69 30.82,28.89 30.82,32.79 JP1.7
N$16  (via drill 0.35)
  Top 0.2: v64.52,73.59 63.62,72.69 63.62,72.29 U$3.10 | U$1.69 118.72,47.79 121.12,47.79 U$1.69'
  Bottom 0.2: v64.52,73.59 80.12,73.59 84.42,77.89 84.42,78.69 85.32,79.59 86.12,79.59 87.02,80.49 87.02,81.29 88.12,82.39 106.02,82.39 107.32,81.09 107.32,80.29 108.22,79.39 109.02,79.39 109.82,78.59 109.82,77.79 118.32,69.29 119.12,69.29 120.02,68.39 120.02,67.59 120.92,66.69 121.72,66.69 122.42,65.99 122.42,48.99 121.22,47.79 U$1.69'
N$17
  Top 0.2: U$1.68' U$1.68
N$18
  Top 0.2: U$1.67 118.72,52.89 121.12,52.89 U$1.67'
N$19
  Top 0.2: U$1.66 118.72,55.39 121.12,55.39 U$1.66'
N$20
  Top 0.2: U$1.65 118.72,57.99 121.12,57.99 U$1.65'
N$21
  Top 0.2: U$1.64 118.72,60.49 121.12,60.49 U$1.64'
N$22
  Top 0.2: U$3.7 63.62,66.29 63.62,65.89 64.02,65.49 68.02,65.49 69.52,66.99 R6.1
N$23
  Bottom 0.2: IC3.26 84.32,22.09 84.32,26.39 JP5.6
N$24
  Top 0.2: U$1.61 118.72,68.09 121.12,68.09 U$1.61'
N$25  (via drill 0.35)
  Top 0.2: v67.22,53.79 66.92,53.49 66.92,51.69 U$2.50 | v73.32,62.59 73.32,62.79 77.62,67.09 77.62,74.39 74.12,77.89 74.12,81.29 73.42,81.99 64.92,81.99 63.92,80.99 63.92,80.29 63.02,79.39 62.32,79.39 61.42,78.49 61.42,77.79 57.52,73.89 53.52,73.89 52.82,73.19 48.62,73.19 40.02,64.59 40.02,46.79 v40.32,46.49 | v31.22,38.99 31.22,36.79 27.32,32.89 JP1.6
  Bottom 0.2: v67.22,53.79 67.22,58.89 68.62,60.29 69.52,60.29 71.12,61.89 72.62,61.89 v73.32,62.59 | v40.32,46.49 39.92,46.49 36.72,43.29 35.52,43.29 v31.22,38.99
N$26
  Top 0.2: D1.A 62.12,3.49 62.12,7.49 R2.2
N$27
  Top 0.2: 83.07,43.14 84.32,44.39 Y2.1 | 83.07,43.14 83.02,43.09 69.02,43.09 U$2.34 | C17.2 83.12,35.99 83.12,43.09 83.07,43.14
N$28
  Top 0.2: 80.52,50.79 81.82,52.09 C16.1 | 80.52,50.79 73.82,44.09 69.02,44.09 U$2.36 | 80.52,50.79 84.32,46.99 Y2.2
N$29
  Top 0.2: U$1.18 19.62,78.29 19.62,80.69 U$1.18'
N$30
  Top 0.2: U$1.19 22.12,78.29 22.12,80.69 U$1.19'
N$31  (via drill 0.35)
  Top 0.2: v67.52,47.89 67.42,47.99 67.42,51.59 U$2.49 | v68.02,39.29 68.02,38.39 v59.22,29.59 | v54.92,26.39 53.32,26.39 v52.12,25.19
  Bottom 0.2: v67.52,47.89 67.52,39.79 v68.02,39.29 | v59.22,29.59 58.32,29.59 57.22,28.49 56.62,28.49 54.92,26.79 v54.92,26.39 | v52.12,25.19 52.12,24.09 46.22,18.19 38.42,18.19 23.82,32.79 JP1.5
N$32
  Bottom 0.2: IC3.27 85.62,22.09 85.62,24.99 89.32,28.69 89.32,28.89 JP5.7
N$33
  Bottom 0.2: IC3.28 86.92,22.09 86.92,23.99 91.82,28.89 JP5.8
N$34
  Bottom 0.2: IC3.1 95.82,12.49 112.22,28.89 JP6.1
N$35
  Bottom 0.2: IC3.2 85.62,12.49 85.62,12.79 91.92,19.09 99.92,19.09 JP6.2
N$36
  Bottom 0.2: IC3.3 84.32,12.49 84.32,12.79 91.02,19.49 97.72,19.49 107.12,28.89 JP6.3
N$37
  Bottom 0.2: IC3.4 83.02,14.59 88.32,19.89 95.62,19.89 104.62,28.89 JP6.4
N$38  (via drill 0.35)
  Top 0.2: v82.32,13.79 86.92,13.79 v95.62,22.49
  Bottom 0.2: v82.32,13.79 81.82,13.29 81.82,12.49 IC3.5 | v95.62,22.49 102.02,28.89 JP6.5
N$39
  Bottom 0.2: IC3.6 80.52,12.49 80.52,12.99 87.82,20.29 90.92,20.29 99.52,28.89 JP6.6
N$40
  Bottom 0.2: IC3.7 79.22,12.49 79.22,12.69 87.22,20.69 88.82,20.69 JP6.7
N$41
  Bottom 0.2: IC3.8 78.02,12.49 78.02,12.79 86.32,21.09 87.32,21.09 94.42,28.19 94.42,28.89 JP6.8
N$42
  Top 0.2: U$1.33 57.72,78.29 57.72,80.69 U$1.33'
N$43
  Top 0.2: U$1.34 60.22,78.29 60.22,80.69 U$1.34'
N$48
  Top 0.2: U$1.40 75.52,78.29 75.52,80.69 U$1.40'
N$55
  Top 0.2: U$1.47 93.32,78.29 93.32,80.69 U$1.47'
N$56
  Top 0.2: U$1.48 95.82,78.29 95.82,80.69 U$1.48'
N$57
  Top 0.2: U$1.49 98.32,78.29 98.32,80.69 U$1.49'
N$67
  Top 0.2: U1.22 23.72,44.79 23.72,44.09 24.42,43.39 31.72,43.39 33.12,44.79 33.12,57.99 28.12,62.99 20.62,62.99 19.32,61.69 R4.1
N$68
  Top 0.2: U1.23 24.32,44.79 24.32,44.09 24.62,43.79 31.52,43.79 32.72,44.99 32.72,50.99 28.92,54.79 23.92,54.79 22.12,56.59 R3.2
N$69
  Top 0.2: D3.A 25.32,60.49 23.22,60.49 22.12,61.59 R4.2
N$70
  Top 0.2: R3.1 20.62,57.99 23.02,57.99 23.72,57.29 25.32,57.29 D2.A
N$71
  Top 0.2: U$3.6 62.92,66.39 62.92,67.19 62.02,68.09 50.52,68.09 R5.2
N$73
  Top 0.2: U$3.8 64.32,66.39 64.62,66.39 66.82,68.59 67.22,68.59 69.32,70.69 69.32,72.09 R7.1
N$77
  Top 0.2: 18.67,53.04 19.82,54.19 25.22,54.19 25.62,53.79 25.62,52.19 U1.4 | 18.67,53.04 18.62,52.99 18.62,51.29 20.32,49.59 20.32,44.89 U1.17 | 18.67,53.04 17.72,53.99 3.82,53.99 2.82,52.99 2.82,45.09 3.92,43.99 7.22,43.99 10.62,40.59 20.52,40.59 C20.1
NO  (via drill 0.35)
  Top 0.2: v89.62,55.09 78.22,55.09 77.52,54.39 77.52,49.99 74.12,46.59 69.02,46.59 U$2.41
  Bottom 0.2: v89.62,55.09 89.62,46.69 92.92,43.39 Y1.1 92.92,43.29 91.52,41.89 91.52,36.79 C15.1
PA3  (via drill 0.35)
  Top 0.2: v61.22,43.89 61.22,42.19 61.42,41.99 61.42,41.09 U$2.20
  Bottom 0.2: Q1.2 114.02,67.39 111.82,67.39 110.52,68.69 R20.2 110.42,68.79 108.12,71.09 91.22,71.09 83.42,63.29 65.02,63.29 63.42,61.69 63.42,54.69 60.32,51.59 60.32,49.79 60.52,49.59 60.52,48.09 60.32,47.89 60.32,45.79 61.22,44.89 v61.22,43.89
PA4  (via drill 0.35)
  Top 0.2: v61.92,42.49 61.92,41.09 U$2.21 | v65.82,33.59 65.82,30.19 v66.12,29.89 | v67.22,28.49 72.82,28.49 73.62,27.69 77.22,27.69 78.02,28.49 78.02,29.39 79.92,31.29 108.12,31.29 118.32,41.49 121.72,41.49 122.42,42.19 122.42,43.09 121.52,43.99 118.22,43.99 117.52,44.69 117.52,45.69 118.42,46.59 121.72,46.59 122.42,47.29 122.42,55.79 121.52,56.69 118.22,56.69 113.82,61.09 113.82,62.69 v113.42,63.09
  Bottom 0.2: 113.42,63.89 111.02,63.89 110.32,63.19 R22.2 | 113.42,63.89 114.22,63.89 Q2.2 | v61.92,42.49 61.92,39.79 60.62,38.49 60.62,37.89 64.92,33.59 v65.82,33.59 | v66.12,29.89 66.12,29.59 v67.22,28.49 | 113.42,63.89 v113.42,63.09
PA5  (via drill 0.35)
  Top 0.2: v62.72,37.49 62.02,38.19 62.02,39.69 62.42,40.09 62.42,40.99 U$2.22 | v68.12,35.39 68.52,35.39 70.12,36.99 v73.12,36.99 | v109.82,55.89 109.82,81.19 110.62,81.99 112.32,81.99 113.52,80.79 U$1.55' 113.62,80.69 113.62,78.29 U$1.55
  Bottom 0.2: v62.72,37.49 63.42,37.49 65.52,35.39 v68.12,35.39 | v73.12,36.99 86.22,36.99 87.72,35.49 92.42,35.49 94.22,37.29 94.22,41.29 108.82,55.89 v109.82,55.89
PA6  (via drill 0.35)
  Top 0.2: v62.72,39.39 62.92,39.59 62.92,40.99 U$2.23 | v110.52,56.59 110.52,77.69 111.02,78.19 U$1.54 111.02,78.29 111.02,80.69 U$1.54'
  Bottom 0.2: v62.72,39.39 65.62,36.49 68.62,36.49 71.02,34.09 92.22,34.09 106.42,48.29 106.42,51.49 110.52,55.59 v110.52,56.59
PB0  (via drill 0.35)
  Top 0.2: v70.42,56.99 70.72,56.69 70.72,53.49 67.82,50.59 67.82,48.79 68.02,48.59 68.92,48.59 U$2.45 | v75.42,59.49 75.42,59.89 v83.12,67.59 | U$1.51 U$1.51'
  Bottom 0.2: v70.42,56.99 72.92,56.99 v75.42,59.49 | v83.12,67.59 85.92,67.59 95.42,77.09 102.32,77.09 103.42,78.19 U$1.51
PB1  (via drill 0.35)
  Top 0.2: v70.72,49.09 69.02,49.09 U$2.46 | v75.32,53.69 75.32,56.19 v84.42,65.29 | v104.72,76.79 104.72,76.99 U$1.52 106.02,78.29 106.02,80.69 U$1.52'
  Bottom 0.2: v75.32,53.69 v70.72,49.09 | v84.42,65.29 84.82,65.29 91.22,71.69 99.62,71.69 v104.72,76.79
PB4  (via drill 0.35)
  Top 0.2: v41.82,64.79 44.02,66.99 56.32,66.99 56.72,66.59 56.72,64.99 62.22,59.49 62.22,53.49 62.92,52.79 62.92,51.69 U$2.58 | v23.42,69.59 24.82,69.59 v25.82,70.59
  Bottom 0.2: v41.82,64.79 41.22,64.79 37.52,68.49 33.02,68.49 28.22,73.29 26.12,73.29 25.82,72.99 25.82,70.69 25.87,70.64 | 25.87,70.64 27.12,69.39 R11.1 | v23.42,69.59 19.02,69.59 R10.1 | v25.82,70.59 25.87,70.64
PB5  (via drill 0.35)
  Top 0.2: v59.72,63.49 62.62,60.59 62.62,53.69 63.42,52.89 63.42,51.69 U$2.57 | v65.92,66.69 66.92,66.69 v68.92,68.69 | v81.62,69.09 v78.22,65.69 | U$1.46 U$1.46'
  Bottom 0.2: v59.72,63.49 59.72,64.49 61.92,66.69 v65.92,66.69 | v68.92,68.69 70.72,68.69 73.72,65.69 v78.22,65.69 | v81.62,69.09 90.72,78.19 U$1.46
PD3  (via drill 0.35)
  Top 0.2: v57.62,50.89 58.32,51.59 59.82,51.59 U$2.64 | v49.02,42.29 49.02,34.19 45.82,30.99 42.52,30.99 41.92,30.39 41.92,26.89 44.32,24.49 57.92,24.49 62.62,29.19 66.42,29.19 67.62,30.39 67.62,31.29 68.02,31.69 69.82,31.69 70.02,31.49 70.62,31.49 73.82,34.69 73.82,38.69 74.22,39.09 74.92,39.09 79.32,34.69 84.12,34.69 85.52,36.09 85.52,43.49 85.92,43.89 90.72,43.89 97.52,37.09 100.92,37.09 102.22,38.39 102.22,47.19 R16.1 102.32,47.29 99.52,50.09 99.52,53.69 R17.1
  Bottom 0.2: v49.02,42.29 v57.62,50.89
PE0  (via drill 0.25, 0.35)  (1 unrouted)
  Top 0.2: v92.92,54.39 v80.32,54.39 | U$2.9 58.4,46.17 59.53,46.17 61.93,48.57 62.5,48.57 63.29,47.79 v64.47,47.83
  Bottom 0.2: v80.32,54.39 72.62,54.39 R13.1 | v92.92,54.39 97.12,58.59 102.52,58.59 103.82,59.89 R12.1 | 64.47,48.37 64.47,48.55 v68.31,52.39
  Bottom 0.254: v64.47,47.83 64.47,48.37 64.47,48.49
PE1  (via drill 0.35)
  Top 0.2: v51.32,56.99 51.02,56.69 51.02,51.49 55.82,46.69 56.52,46.69 56.62,46.59 58.32,46.59 U$2.8 | v28.82,68.39 7.22,68.39 U$1.12 6.82,68.09 4.42,68.09 U$1.12'
  Bottom 0.2: v51.32,56.99 50.92,56.99 46.12,61.79 40.72,61.79 36.52,65.99 32.62,65.99 30.22,68.39 v28.82,68.39
PE2  (via drill 0.35)
  Top 0.2: v56.12,47.39 56.42,47.09 58.32,47.09 U$2.7 | v53.22,42.39 53.22,39.79 v56.32,36.69 | v68.72,30.59 69.72,29.59 73.12,29.59 77.62,34.09 94.32,34.09 96.32,32.09 96.92,32.09 108.82,43.99 108.82,46.69 R14.1 107.82,47.79 107.82,53.79 R15.1
  Bottom 0.2: v56.12,47.39 56.12,46.29 53.22,43.39 v53.22,42.39 | v56.32,36.69 58.52,36.69 64.62,30.59 v68.72,30.59
PE3  (via drill 0.35)
  Top 0.2: v51.72,55.59 51.72,52.39 54.82,49.29 55.22,49.29 56.92,47.59 58.32,47.59 U$2.6 | v29.92,67.69 29.92,68.29 21.12,77.09 8.02,77.09 6.92,78.19 U$1.16 6.82,78.29 4.42,78.29 U$1.16'
  Bottom 0.2: v51.72,55.59 46.52,60.79 41.12,60.79 39.12,62.79 34.82,62.79 v29.92,67.69
PE4  (via drill 0.35)
  Top 0.2: v53.12,64.69 61.82,55.99 61.82,53.29 62.42,52.69 62.42,51.69 U$2.59 | v48.12,69.09 48.12,70.69 48.72,71.29 v48.72,72.29 | U$1.43' 83.12,80.69 83.12,78.29 U$1.43
  Bottom 0.2: v53.12,64.69 48.72,69.09 v48.12,69.09 | v48.72,72.29 48.72,72.89 43.62,77.99 43.62,79.09 43.52,79.19 43.52,80.19 43.82,80.49 43.82,81.29 44.52,81.99 53.02,81.99 54.02,80.99 54.02,80.29 54.92,79.39 58.22,79.39 59.02,78.59 59.02,77.79 61.12,75.69 80.52,75.69 83.02,78.19 U$1.43
PE5  (via drill 0.35)
  Top 0.2: v61.92,50.19 61.92,51.59 U$2.60 | v64.12,60.29 64.12,64.39 v63.62,64.89 | v58.02,70.99 58.02,72.39 62.72,77.09 v63.72,77.09
  Bottom 0.2: v61.92,50.19 61.92,52.59 64.12,54.79 v64.12,60.29 | v63.62,64.89 65.12,64.89 67.32,67.09 67.32,67.69 66.02,68.99 60.02,68.99 v58.02,70.99 | v63.72,77.09 65.82,77.09 66.72,77.99 66.72,78.79 67.32,79.39 79.42,79.39 79.47,79.34 | 79.47,79.34 80.52,78.29 U$1.42 | 79.47,79.34 80.52,80.39 80.52,80.69 U$1.42'
PF3  (via drill 0.35)
  Top 0.2: v66.92,38.39 66.92,40.99 U$2.31 | v105.72,51.79 105.72,68.59 100.92,73.39 100.92,78.19 U$1.50 100.92,78.29 100.92,80.69 U$1.50'
  Bottom 0.2: v66.92,38.39 67.32,38.39 70.62,35.09 92.62,35.09 105.72,48.19 v105.72,51.79
PF4  (via drill 0.35)
  Top 0.2: v56.92,48.59 57.42,48.09 58.32,48.09 U$2.5 | v55.92,45.09 55.22,44.39 55.22,43.79 56.52,42.49 v56.92,42.49 | U$1.53' 108.52,80.69 108.52,78.29 U$1.53
  Bottom 0.2: v56.92,48.59 56.92,46.09 v55.92,45.09 | v56.92,42.49 56.92,38.89 62.92,32.89 82.92,32.89 83.12,32.69 92.52,32.69 113.12,53.29 113.12,56.19 115.92,58.99 116.52,58.99 117.52,59.99 117.52,60.99 118.32,61.79 119.12,61.79 119.82,62.49 119.82,65.99 118.92,66.89 118.22,66.89 116.62,68.49 116.62,70.29 108.72,78.19 108.52,78.19 U$1.53
RPE
  Top 0.2: U$1.63 U$1.63'
  Bottom 0.2: U$1.63 116.42,62.99 Q2.3 116.42,62.89 115.72,62.19 115.72,60.29 R23.2
RS  (via drill 0.35)
  Top 0.2: v65.12,39.59 65.42,39.89 65.42,40.99 U$2.28 | v57.62,39.19 56.42,39.19 v56.22,38.99 | v56.02,40.79 56.02,41.19 53.82,43.39 53.82,44.49 41.92,56.39 40.92,56.39 40.52,56.79 40.52,59.99 v40.72,60.19 | v30.12,66.49 30.12,66.89 30.62,67.39 30.62,77.39 29.82,78.19 U$1.22 29.82,78.29 29.82,80.69 U$1.22'
  Bottom 0.2: v65.12,39.59 64.42,38.89 63.82,38.89 63.42,39.29 63.42,41.99 62.22,43.19 61.62,43.19 v57.62,39.19 | v56.22,38.99 56.22,40.59 v56.02,40.79 | v40.72,60.19 40.32,60.19 38.12,62.39 34.22,62.39 v30.12,66.49
RST  (via drill 0.35)
  Top 0.2: v77.02,14.99 77.02,10.89 74.92,8.79 74.52,8.79 | 74.52,8.79 73.32,8.79 S1.1 73.22,8.69 72.52,7.99 69.32,7.99 R1.2 | v70.42,44.79 70.12,45.09 69.02,45.09 U$2.38 | v70.42,36.29 70.42,32.29 v70.32,32.19 | 74.52,8.79 74.52,3.69 73.72,2.89 72.82,2.89 72.12,3.59 69.32,3.59 C9.1
  Bottom 0.2: v77.02,14.99 74.22,17.79 74.22,21.99 IC3.18 74.12,22.09 74.12,27.19 70.32,30.99 v70.32,32.19 | v70.42,36.29 v70.42,44.79 | JP1.1 9.82,32.79 11.32,32.79 35.62,8.49 38.22,8.49 41.22,5.49 41.22,5.09 41.92,4.39 68.92,4.39 73.22,8.69 S1.1
RX  (via drill 0.35)
  Top 0.2: v55.12,38.89 57.22,40.99 59.82,40.99 U$2.17 | v48.32,34.49 42.62,34.49 v39.02,30.89
  Bottom 0.2: v55.12,38.89 52.72,38.89 v48.32,34.49 | v39.02,30.89 37.62,29.49 35.62,29.49 32.22,32.89 32.22,33.39 30.92,34.69 15.12,34.69 13.32,32.89 JP1.2
RXD  (via drill 0.35)
  Top 0.2: v30.52,52.19 27.62,52.19 U1.1 | v41.22,57.09 43.22,57.09 54.82,45.49 54.82,43.59 56.62,41.79 57.52,41.79 U$2.16
  Bottom 0.2: v30.52,52.19 30.72,52.19 36.32,57.79 40.52,57.79 v41.22,57.09
SCL  (via drill 0.35)
  Top 0.2: v61.42,64.19 61.02,64.59 61.02,66.29 U$3.3 | v75.52,63.99 75.52,60.59 74.22,59.29 74.22,52.09 75.02,51.29 75.02,48.69 74.62,48.29 73.92,48.29 | 73.92,48.29 73.42,48.29 71.92,49.79 70.02,49.79 69.82,49.59 69.02,49.59 U$2.47 | v73.92,47.99 73.92,48.29 | v74.52,38.39 74.52,34.79 v70.02,30.29 | v66.82,27.09 65.42,27.09 62.32,23.99 JP7.1
  Bottom 0.2: v61.42,64.19 68.72,64.19 69.22,64.69 74.82,64.69 v75.52,63.99 | 72.82,12.49 72.82,17.19 66.22,23.79 66.22,24.59 65.52,25.29 63.62,25.29 62.32,23.99 JP7.1 | 72.82,12.49 72.82,12.19 69.42,8.79 61.12,8.79 56.52,13.39 56.52,17.09 R9.1 | 72.82,12.49 IC3.12 | v73.92,47.99 73.92,45.79 74.52,45.19 v74.52,38.39 | v66.82,27.09 v70.02,30.29
SDA  (via drill 0.35)
  Top 0.2: v60.42,64.19 60.42,66.29 U$3.2 | v69.52,63.99 69.52,60.09 71.12,58.49 71.12,52.29 71.07,52.24 | U$2.48 71.07,52.24 | v94.42,30.59 94.22,30.79 84.42,30.79 83.02,29.39 83.02,28.39 78.72,24.09 65.02,24.09 JP8.1 | v86.22,43.19 v96.62,32.79 | 71.07,52.24 v74.32,48.99
  Bottom 0.2: 64.92,17.09 64.22,17.09 R8.1 64.92,17.09 | 64.92,17.09 67.22,17.09 71.52,12.79 71.52,12.49 IC3.13 | 64.92,17.09 64.92,23.99 JP8.1 | v60.42,64.19 61.12,63.49 64.62,63.49 64.92,63.79 69.32,63.79 v69.52,63.99 | v96.62,32.79 v94.42,30.59 | v86.22,43.19 80.12,43.19 v74.32,48.99
SDFSDFSD  (via drill 0.35)
  Top 0.2: U3.8 89.32,63.99 U3.9 90.62,63.89 90.62,63.49 v96.82,57.29 | v111.22,55.49 111.72,54.99 111.72,46.79 R14.2
  Bottom 0.2: v96.82,57.29 110.82,57.29 111.22,56.89 v111.22,55.49
SERVO1  (via drill 0.35)
  Top 0.2: v58.62,50.89 58.42,50.69 58.42,50.19 U$2.1 | v46.62,33.79 44.32,33.79 43.02,32.49 SERVO1.1
  Bottom 0.2: v58.62,50.89 58.62,46.15 58.62,45.79 v46.62,33.79
SERVO2  (via drill 0.35)
  Top 0.2: v59.82,48.39 59.62,48.59 58.42,48.59 U$2.4 | SERVO2.1 v50.02,44.29
  Bottom 0.2: v59.82,48.39 59.82,51.69 62.62,54.49 62.62,62.19 62.12,62.69 60.22,62.69 59.52,61.99 59.52,53.99 55.82,50.29 55.82,49.69 50.42,44.29 v50.02,44.29
SERVO3
  Top 0.2: U$2.24 63.42,40.99 63.42,37.19 58.72,32.49 57.02,32.49 SERVO3.1
SHARP1  (via drill 0.35)
  Top 0.2: v83.92,79.49 84.32,79.09 84.32,77.89 85.12,77.09 86.92,77.09 93.72,70.29 93.72,70.19 94.32,69.59 U3.3 | v56.02,81.99 42.02,81.99 41.12,81.09 41.12,77.49 31.02,67.39 31.02,66.39 30.22,65.59 6.92,65.59 U$1.11 6.82,65.59 4.42,65.59 U$1.11'
  Bottom 0.2: v83.92,79.49 82.72,79.49 81.72,80.49 81.72,81.29 81.02,81.99 v56.02,81.99
SHARP2  (via drill 0.35)
  Top 0.2: v92.32,62.79 91.82,63.29 91.82,63.89 U3.10 | v78.92,72.89 v87.52,64.29 | v53.82,74.59 47.62,74.59 46.62,73.59 v43.82,73.59 | v33.72,81.99 6.42,81.99 3.22,78.79 3.22,76.79 4.32,75.69 U$1.15' U$1.15
  Bottom 0.2: v92.32,62.79 89.92,62.79 88.42,64.29 v87.52,64.29 | v78.92,72.89 55.52,72.89 v53.82,74.59 | v43.82,73.59 42.92,73.59 38.52,77.99 38.52,78.79 37.72,79.59 36.92,79.59 36.02,80.49 36.02,81.29 35.32,81.99 v33.72,81.99
SHARP3
  Top 0.2: U3.5 91.72,69.59 91.72,69.79 86.82,74.69 81.52,74.69 78.02,78.19 U$1.41 U$1.41'
SHARP4
  Top 0.2: U3.12 94.32,63.99 93.72,64.59 93.72,64.69 92.82,65.59 88.92,65.59 76.82,77.69 76.82,81.19 77.62,81.99 84.42,81.99 U$1.44' 85.62,80.69 85.62,78.29 U$1.44
SHARP5  (via drill 0.35)
  Top 0.2: v66.62,67.39 70.02,70.79 70.42,70.79 71.02,71.39 71.02,73.19 71.32,73.49 73.12,73.49 75.42,71.19 75.42,70.09 75.82,69.69 v76.92,69.69 | U$1.45' 88.22,80.69 88.22,78.29 U$1.45
  Bottom 0.2: v66.62,67.39 52.72,67.39 50.32,69.79 41.62,69.79 41.02,69.19 36.82,69.19 U2.3 | v76.92,69.69 80.72,69.69 88.12,77.09 88.12,78.19 U$1.45
TX  (via drill 0.35)
  Top 0.2: v49.22,28.49 57.22,28.49 58.12,29.39 58.12,30.39 57.52,30.99 56.92,30.99 55.92,31.99 55.92,32.89 60.42,37.39 60.42,40.99 U$2.18
  Bottom 0.2: v49.22,28.49 49.22,28.09 48.42,27.29 48.42,20.99 46.02,18.59 40.32,18.59 27.52,31.39 26.72,31.39 25.22,32.89 25.22,33.39 24.32,34.29 18.22,34.29 16.82,32.89 JP1.3
TXD  (via drill 0.35)
  Top 0.2: v31.62,51.09 25.32,51.09 25.02,51.39 25.02,52.09 U1.5 | v42.12,51.09 43.22,51.09 v47.62,46.69 | v52.22,47.09 52.22,46.69 54.22,44.69 54.22,43.59 56.42,41.39 58.52,41.39 59.52,42.39 59.52,42.89 59.32,43.09 58.42,43.09 U$2.15
  Bottom 0.2: v42.12,51.09 v31.62,51.09 | v47.62,46.69 51.82,46.69 v52.22,47.09
USB+
  Top 0.2: U1.15 19.02,44.89 9.72,44.89 6.92,47.69 U$1.4 6.82,47.79 4.42,47.79 U$1.4'
USB-
  Top 0.2: U1.16 19.72,44.89 19.72,45.59 15.02,50.29 U$1.5 U$1.5'
VBATTERY
  Top 0.8: IC2.1 42.32,6.39 41.92,5.99 37.32,5.99 36.02,7.29 35.32,7.29 C18.1 35.02,7.69 35.02,10.59 33.42,12.19 33.42,16.79 | U$1.29' 47.52,80.69 47.52,78.29 U$1.29 47.22,77.99 46.82,77.99 37.62,68.79 37.62,31.89 36.32,30.59 36.32,24.89 30.82,19.39 IC1.3 30.32,19.39 32.92,16.79 33.42,16.79 | 33.42,16.79 C4.1
VDD  (via drill 0.25, 0.35)
  Top 0.254: U$2.2 60.53,49.62 v60.98,50.07 | 64.33,47.12 61.95,47.12 v60.96,46.12 59.95,45.12 U$2.11 58.32,45.14 57.41,45.14 56.29,46.26 55.41,46.26 | 64.33,47.12 66.53,47.12 | 66.53,47.12 U$2.42 | 64.33,47.12 64.98,46.46 64.98,45.91 66.28,44.62 U$2.37 | 66.53,47.12 66.16,47.49 66.16,48.15 64.89,49.41 U$2.54 | v63.33,43.14 64.39,42.08 U$2.26
  Top 0.5: U$3.5 62.32,66.39 62.32,66.99 61.92,67.39 60.02,67.39 59.72,67.09 59.72,66.39 U$3.1 59.52,66.19 v58.02,64.69 | v50.22,54.69 50.45,54.69 | C5.1 27.92,14.89 27.92,19.39 IC1.2 28.02,19.69 33.72,25.39 v35.32,25.39 | v50.22,51.09 50.45,51.22 | v76.32,11.19 69.72,11.19 66.52,7.99 R1.1 66.22,7.99 65.12,9.09 61.42,9.09 | 61.42,9.09 61.12,9.09 59.62,7.59 59.32,7.59 R2.1 | v112.02,58.39 112.02,55.89 v113.82,54.09 | v61.42,9.49 61.42,9.09
  Top 0.508: 55.41,46.26 50.45,51.22 50.45,54.69 R5.1
  Bottom 0.254: v60.98,50.07 60.98,48.12 | 60.98,48.12 60.98,46.15 v60.96,46.12 | 60.98,48.12 63.33,45.78 v63.33,43.14
  Bottom 0.5: C11.1 46.42,58.69 46.22,58.49 46.22,54.69 C7.1 46.42,54.69 v50.22,54.69 52.02,54.69 52.62,55.29 52.62,58.09 58.02,63.49 v58.02,64.69 | R9.2 54.02,17.09 55.52,18.59 | 55.52,18.59 59.92,18.59 61.32,17.19 R8.2 61.42,16.99 v61.42,9.49 | v35.32,25.39 42.82,25.39 45.72,28.29 45.72,31.19 | 45.72,31.19 45.72,38.29 46.12,38.69 C8.1 46.22,38.99 46.22,43.29 C14.1 46.22,43.59 C13.1 46.32,47.29 46.32,50.89 C12.1 46.42,51.09 v50.22,51.09 | 45.72,31.19 50.52,31.19 54.02,27.69 54.02,26.09 55.42,24.69 55.42,18.79 55.52,18.59 | Q2.1 114.32,62.09 114.32,62.49 115.22,63.39 115.22,64.59 114.32,65.49 Q1.1 114.02,65.49 110.92,65.49 110.52,65.89 R20.1 110.42,65.69 108.92,64.19 108.92,62.09 110.22,60.79 110.22,60.39 R22.1 110.32,60.09 v112.02,58.39 | 76.62,11.49 76.62,12.49 IC3.9 | v76.32,11.19 76.62,11.49 | v113.82,54.09 113.82,28.49 96.72,11.39 76.82,11.39 76.62,11.49
VDDC  (via drill 0.25, 0.35)
  Top 0.2: U$2.25 63.92,40.99 63.92,39.79 v64.12,39.59 64.02,39.59 64.02,37.19 62.32,35.49 v62.32,35.09 | v59.72,38.29 v57.72,40.29 | 63.85,51.15 63.85,51.57 U$2.56 63.9,53.27 v63.75,53.42
  Top 0.254: U$2.56 63.87,51.59 63.87,50.68 63.59,50.4 v63.59,49.85
  Bottom 0.2: C1.1 61.22,61.39 61.22,58.19 C2.1 61.12,58.09 61.12,53.59 59.32,51.79 59.32,48.89 59.12,48.69 59.12,45.29 60.52,43.89 60.52,43.09 v57.72,40.29 | 64.12,45.79 64.12,45.32 v64.12,39.59 | C10.1 65.52,61.49 65.52,57.89 C3.1 65.52,57.79 64.72,56.99 64.72,53.35 64.65,53.42 v63.75,53.42 | v59.72,38.29 59.72,37.69 v62.32,35.09
  Bottom 0.254: 64.12,45.32 64.12,45.8 64.42,46.1 64.42,46.95 63.82,47.56 63.82,49.61 v63.59,49.85
VSERVO  (via drill 0.35)
  Top 0.8: v93.72,68.39 93.12,68.99 93.12,69.49 U3.4 | v107.82,70.39 108.42,70.39 v109.12,71.09 | v111.22,70.19 111.22,63.89 v112.82,62.29 113.02,61.99 113.02,57.49 v114.82,55.69 | IC2.3 47.52,6.39 48.02,5.89 50.32,5.89 C19.1 50.62,5.59 v52.52,3.69 | v41.02,66.59 39.32,64.89 39.32,39.39 v43.52,35.19 | SERVO1.2 SERVO2.2 SERVO3.2
  Bottom 0.8: v93.72,68.39 95.42,68.39 97.42,70.39 v107.82,70.39 | v109.12,71.09 110.42,71.09 111.27,70.24 | 111.27,70.24 111.32,70.19 111.72,70.19 112.62,69.29 R21.1 | v112.82,62.29 112.82,60.29 R23.1 | v111.22,70.19 111.27,70.24 | v41.02,66.59 42.32,66.59 U2.8 | v43.52,35.19 43.52,33.89 44.42,32.99 44.42,31.29 SERVO1.2 | SERVO2.2 53.12,26.79 53.12,24.09 47.52,18.49 47.52,6.49 IC2.3 | v114.82,55.69 114.82,28.19 96.52,9.89 83.12,9.89 76.02,2.79 74.02,2.79 73.82,2.59 53.62,2.59 v52.52,3.69
VUSB
  Top 0.2: U1.20 22.32,44.79 22.32,44.09 22.02,43.79 10.02,43.79 7.22,46.59 3.82,46.59 3.22,47.19 3.22,50.79 4.12,51.69 5.72,51.69 6.82,52.79 U$1.6
WL1  (via drill 0.35)
  Top 0.2: v51.32,62.19 60.42,53.09 60.42,51.69 U$2.63 | v41.12,67.69 41.92,67.69 v47.12,72.89 | v46.32,74.29 46.32,74.49 50.02,78.19 U$1.30 50.12,78.29 50.12,80.69 U$1.30'
  Bottom 0.2: v51.32,62.19 45.52,62.19 41.82,65.89 40.72,65.89 40.32,66.29 40.32,66.89 v41.12,67.69 | v47.12,72.89 47.12,73.49 v46.32,74.29
WL2  (via drill 0.35)
  Top 0.2: v52.12,64.69 52.12,63.59 60.92,54.79 60.92,51.69 U$2.62 | v48.82,67.99 48.82,69.69 v51.62,72.49 | U$1.31 U$1.31'
  Bottom 0.2: v48.82,67.99 v52.12,64.69 | v51.62,72.49 51.62,77.19 52.62,78.19 U$1.31
WL3  (via drill 0.35)
  Top 0.2: v53.02,63.69 61.42,55.29 61.42,51.69 U$2.61 | v47.42,68.39 47.42,70.99 v48.02,71.59 | U$1.32 55.22,78.29 55.22,80.69 U$1.32'
  Bottom 0.2: v53.02,63.69 52.12,63.69 v47.42,68.39 | v48.02,71.59 47.42,71.59 41.32,77.69 41.32,81.29 42.42,82.39 53.52,82.39 55.12,80.79 U$1.32'
WL4
  Top 0.2: U$3.15 60.42,72.29 60.42,72.79 65.32,77.69 U$1.36 U$1.36'
WL5  (via drill 0.35)
  Top 0.2: v60.42,70.99 60.92,71.49 60.92,72.19 U$3.14 | v59.02,70.99 59.02,72.69 62.72,76.39 v63.02,76.39 | U$1.37' 67.92,80.69 67.92,78.29 U$1.37
  Bottom 0.2: v59.02,70.99 v60.42,70.99 | v63.02,76.39 66.02,76.39 U$1.37
WL6
  Top 0.2: U$3.13 61.72,72.29 61.72,72.79 66.02,77.09 69.22,77.09 70.32,78.19 U$1.38 70.42,78.29 70.42,80.69 U$1.38'
WL7
  Top 0.2: U$3.12 62.32,72.29 62.32,72.69 66.32,76.69 71.42,76.69 72.92,78.19 U$1.39 72.92,78.29 72.92,80.69 U$1.39'
XXVX  (via drill 0.35)
  Top 0.2: U3.6 89.32,69.59 U3.7 89.22,69.49 v89.22,66.29 | v88.52,64.99 88.52,62.59 97.92,53.19 97.92,48.79 99.42,47.29 R16.2
  Bottom 0.2: v89.22,66.29 89.22,65.69 v88.52,64.99
ZIGBEERX  (via drill 0.35)
  Top 0.2: v55.92,44.09 58.32,44.09 U$2.13 | v41.42,41.59 v47.12,41.59
  Bottom 0.2: v55.92,44.09 53.42,41.59 v47.12,41.59 | v41.42,41.59 34.82,41.59 31.52,38.29 12.92,38.29 7.22,43.99 6.42,43.99 5.72,44.69 5.72,69.49 5.77,69.54 | 5.77,69.54 6.82,70.59 U$1.13 | 5.77,69.54 4.72,70.59 4.42,70.59 U$1.13'
ZIGBEETX  (via drill 0.35)
  Top 0.2: v59.82,43.59 58.42,43.59 U$2.14 | v55.02,41.19 55.02,41.59 v41.92,54.69 | v25.42,69.09 23.92,69.09 23.72,68.89 11.12,68.89 6.92,73.09 U$1.14 6.82,73.19 4.42,73.19 U$1.14'
  Bottom 0.2: v59.82,43.59 57.02,43.59 55.02,41.59 v55.02,41.19 | v41.92,54.69 41.92,57.39 39.82,59.49 29.62,59.49 25.42,63.69 v25.42,69.09

## Text on the board
Dimension: SDA | SCL